# Altium PCB JIANGYA.PcbDoc
Units mil, origin at the board's own origin, x right, y up, seen from the top; angles counter-clockwise.
Board outline 6000 x 4000 mil, 2 copper layers (Top Layer, Bottom Layer); 72 components, 4 nets, 192 pads, 0 vias.
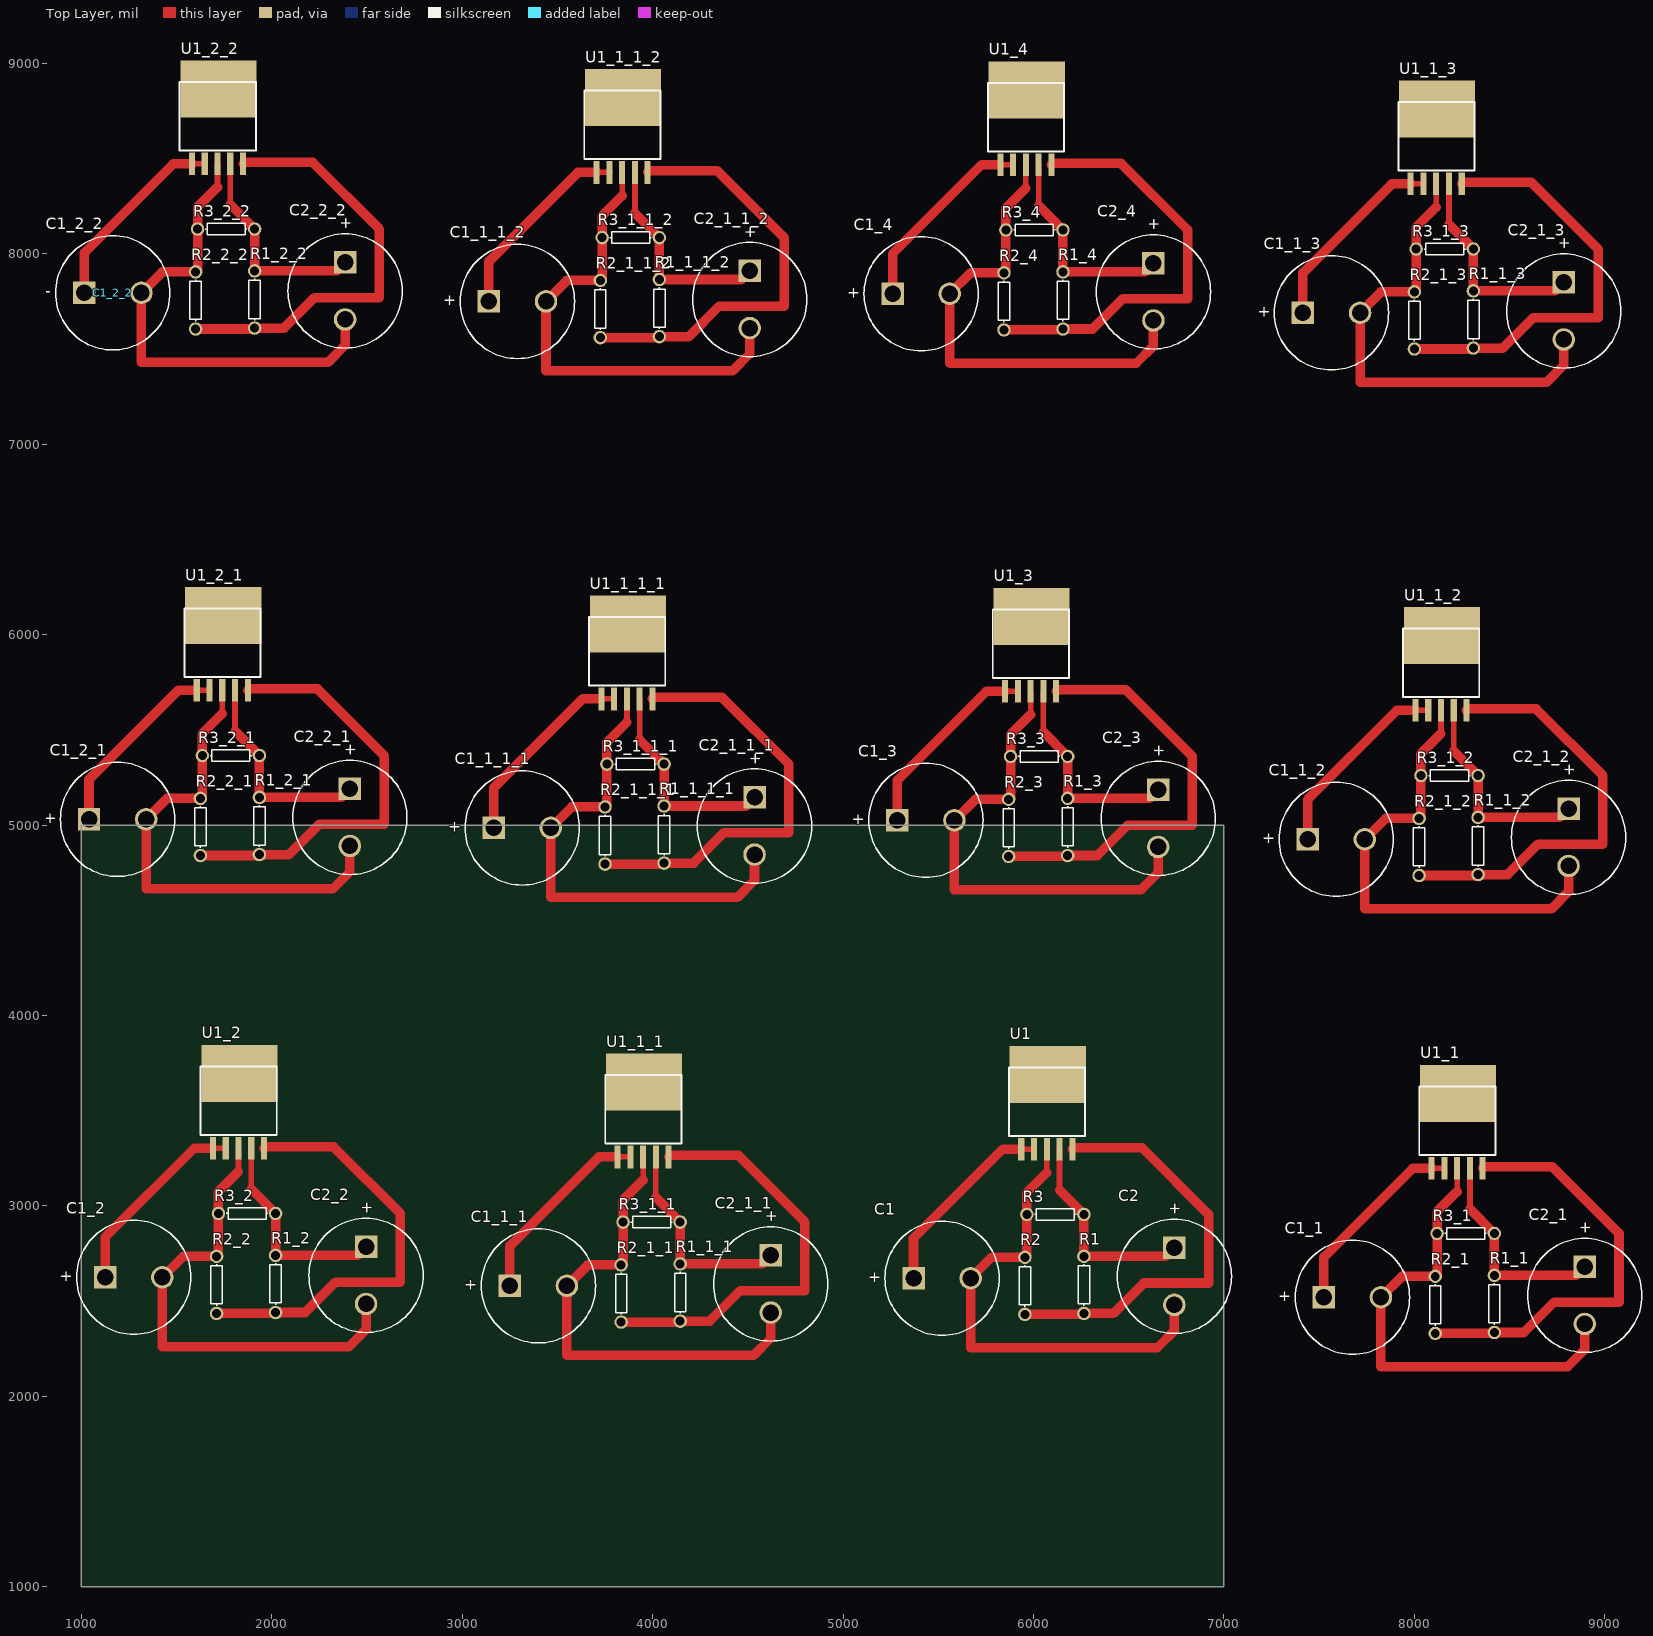
[diagram p0: Top Layer view]
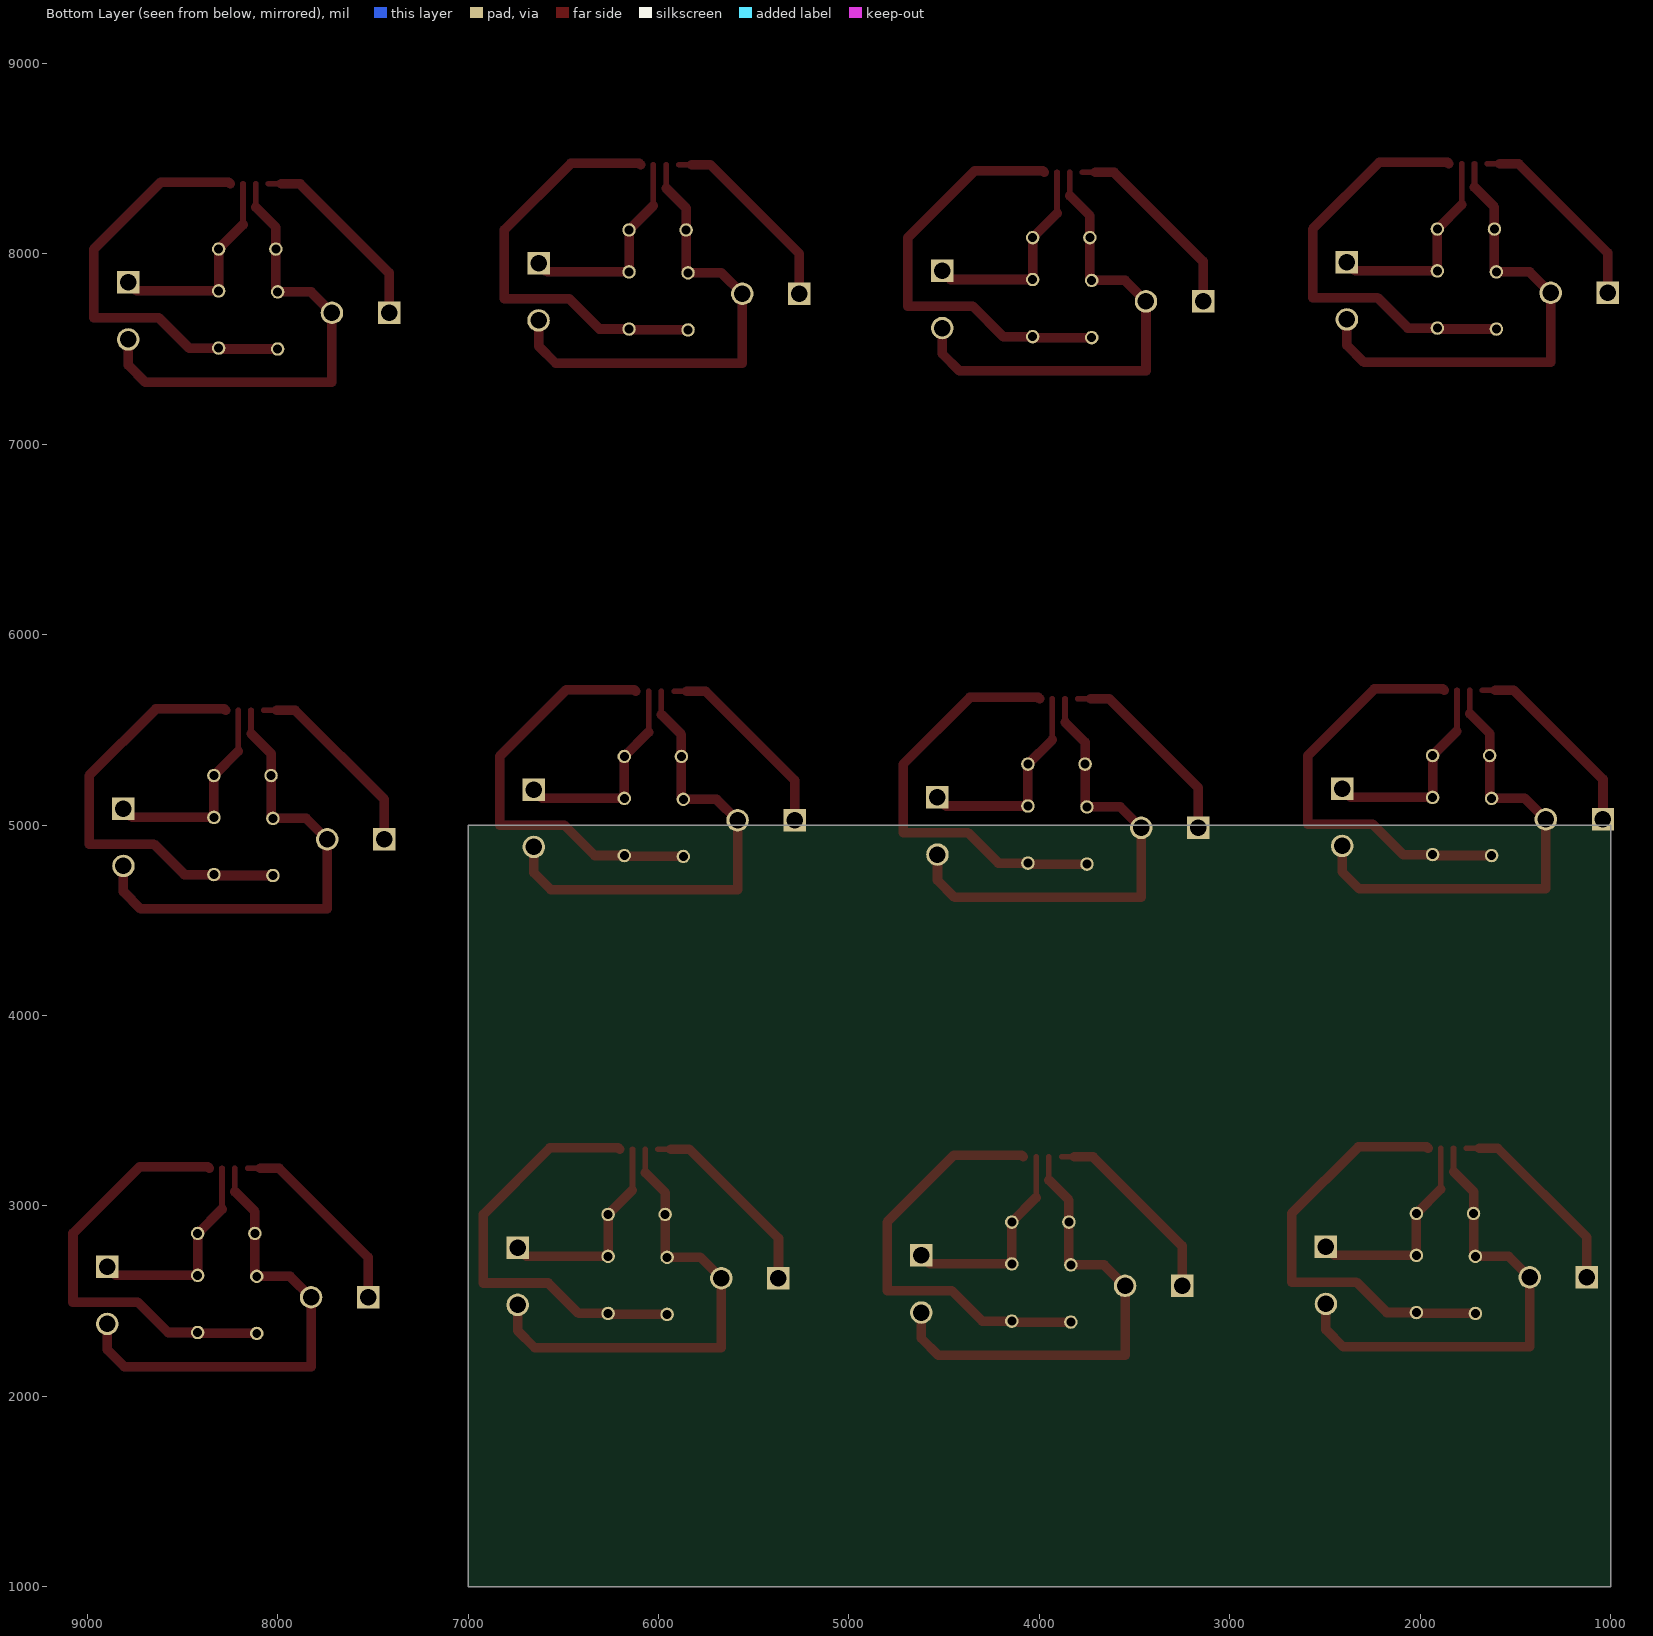
[diagram p1: Bottom Layer view, seen from below]

## Layer stack, top to bottom
Top Layer: signal copper 1.4
Dielectric: dielectric 12.6, FR-4, Dk 4.8
Bottom Layer: signal copper 1.4

## Board outline
1000,1000 7000,1000 7000,5000 1000,5000

## Design rules (kind name [scope] priority, off if disabled: settings)
Clearance [All] p1: gap=10
PolygonConnect [All] p1: connectstyle=Relief reliefconductorwidth=10 reliefentries=4 polygonreliefangle="90 Angle" airgapwidth=10
RoutingVias [All] p1: holewidth=28 width=50 viastyle="Through Hole" minholewidth=28 minwidth=50 maxholewidth=28 maxwidth=50
SolderMaskExpansion [All] p1: expansion=4
Width [All] p1: maxlimit=100 minlimit=20 preferedwidth=50
28 further rules are at their usual default settings.

## Classes and differential pairs
component class JIANGYA: C1 C2 R1 R2 R3 U1

## Components (designator, comment, footprint, x,y, rotation, side; value= is the part's Value field where it differs from the comment)
C1 "10uf" RB7.6-15 5520,2620 r180 top
C1_1 "10uf" RB7.6-15 7675,2520 r180 top (schematic designator C1)
C1_1_1 "10uf" RB7.6-15 3400,2580 r180 top (schematic designator C1)
C1_1_1_1 "10uf" RB7.6-15 3315,4985 r180 top (schematic designator C1)
C1_1_1_2 "10uf" RB7.6-15 3290,7750 r180 top (schematic designator C1)
C1_1_2 "10uf" RB7.6-15 7590,4925 r180 top (schematic designator C1)
C1_1_3 "10uf" RB7.6-15 7565,7690 r180 top (schematic designator C1)
C1_2 "10uf" RB7.6-15 1275,2625 r180 top (schematic designator C1)
C1_2_1 "10uf" RB7.6-15 1190,5030 r180 top (schematic designator C1)
C1_2_2 "10uf" RB7.6-15 1165,7795 r180 top (schematic designator C1)
C1_3 "10uf" RB7.6-15 5435,5025 r180 top (schematic designator C1)
C1_4 "10uf" RB7.6-15 5410,7790 r180 top (schematic designator C1)
C2 "22uf" RB7.6-15 6740,2630 r90 top
C2_1 "22uf" RB7.6-15 8895,2530 r90 top (schematic designator C2)
C2_1_1 "22uf" RB7.6-15 4620,2590 r90 top (schematic designator C2)
C2_1_1_1 "22uf" RB7.6-15 4535,4995 r90 top (schematic designator C2)
C2_1_1_2 "22uf" RB7.6-15 4510,7760 r90 top (schematic designator C2)
C2_1_2 "22uf" RB7.6-15 8810,4935 r90 top (schematic designator C2)
C2_1_3 "22uf" RB7.6-15 8785,7700 r90 top (schematic designator C2)
C2_2 "22uf" RB7.6-15 2495,2635 r90 top (schematic designator C2)
C2_2_1 "22uf" RB7.6-15 2410,5040 r90 top (schematic designator C2)
C2_2_2 "22uf" RB7.6-15 2385,7805 r90 top (schematic designator C2)
C2_3 "22uf" RB7.6-15 6655,5035 r90 top (schematic designator C2)
C2_4 "22uf" RB7.6-15 6630,7800 r90 top (schematic designator C2)
R1 "3.03R" AXIAL-0.3 6265,2585 r90 top
R1_1 "3.03R" AXIAL-0.3 8420,2485 r90 top (schematic designator R1)
R1_1_1 "3.03R" AXIAL-0.3 4145,2545 r90 top (schematic designator R1)
R1_1_1_1 "3.03R" AXIAL-0.3 4060,4950 r90 top (schematic designator R1)
R1_1_1_2 "3.03R" AXIAL-0.3 4035,7715 r90 top (schematic designator R1)
R1_1_2 "3.03R" AXIAL-0.3 8335,4890 r90 top (schematic designator R1)
R1_1_3 "3.03R" AXIAL-0.3 8310,7655 r90 top (schematic designator R1)
R1_2 "3.03R" AXIAL-0.3 2020,2590 r90 top (schematic designator R1)
R1_2_1 "3.03R" AXIAL-0.3 1935,4995 r90 top (schematic designator R1)
R1_2_2 "3.03R" AXIAL-0.3 1910,7760 r90 top (schematic designator R1)
R1_3 "3.03R" AXIAL-0.3 6180,4990 r90 top (schematic designator R1)
R1_4 "3.03R" AXIAL-0.3 6155,7755 r90 top (schematic designator R1)
R2 "R" AXIAL-0.3 5955,2580 r270 top
R2_1 "R" AXIAL-0.3 8110,2480 r270 top (schematic designator R2)
R2_1_1 "R" AXIAL-0.3 3835,2540 r270 top (schematic designator R2)
R2_1_1_1 "R" AXIAL-0.3 3750,4945 r270 top (schematic designator R2)
R2_1_1_2 "R" AXIAL-0.3 3725,7710 r270 top (schematic designator R2)
R2_1_2 "R" AXIAL-0.3 8025,4885 r270 top (schematic designator R2)
R2_1_3 "R" AXIAL-0.3 8000,7650 r270 top (schematic designator R2)
R2_2 "R" AXIAL-0.3 1710,2585 r270 top (schematic designator R2)
R2_2_1 "R" AXIAL-0.3 1625,4990 r270 top (schematic designator R2)
R2_2_2 "R" AXIAL-0.3 1600,7755 r270 top (schematic designator R2)
R2_3 "R" AXIAL-0.3 5870,4985 r270 top (schematic designator R2)
R2_4 "R" AXIAL-0.3 5845,7750 r270 top (schematic designator R2)
R3 "200" AXIAL-0.3 6115,2955 r0 top
R3_1 "200" AXIAL-0.3 8270,2855 r0 top (schematic designator R3)
R3_1_1 "200" AXIAL-0.3 3995,2915 r0 top (schematic designator R3)
R3_1_1_1 "200" AXIAL-0.3 3910,5320 r0 top (schematic designator R3)
R3_1_1_2 "200" AXIAL-0.3 3885,8085 r0 top (schematic designator R3)
R3_1_2 "200" AXIAL-0.3 8185,5260 r0 top (schematic designator R3)
R3_1_3 "200" AXIAL-0.3 8160,8025 r0 top (schematic designator R3)
R3_2 "200" AXIAL-0.3 1870,2960 r0 top (schematic designator R3)
R3_2_1 "200" AXIAL-0.3 1785,5365 r0 top (schematic designator R3)
R3_2_2 "200" AXIAL-0.3 1760,8130 r0 top (schematic designator R3)
R3_3 "200" AXIAL-0.3 6030,5360 r0 top (schematic designator R3)
R3_4 "200" AXIAL-0.3 6005,8125 r0 top (schematic designator R3)
U1 "MIC29302MU" TO263-5 6070,3530 r0 top
U1_1 "MIC29302MU" TO263-5 8225,3430 r0 top (schematic designator U1)
U1_1_1 "MIC29302MU" TO263-5 3950,3490 r0 top (schematic designator U1)
U1_1_1_1 "MIC29302MU" TO263-5 3865,5895 r0 top (schematic designator U1)
U1_1_1_2 "MIC29302MU" TO263-5 3840,8660 r0 top (schematic designator U1)
U1_1_2 "MIC29302MU" TO263-5 8140,5835 r0 top (schematic designator U1)
U1_1_3 "MIC29302MU" TO263-5 8115,8600 r0 top (schematic designator U1)
U1_2 "MIC29302MU" TO263-5 1825,3535 r0 top (schematic designator U1)
U1_2_1 "MIC29302MU" TO263-5 1740,5940 r0 top (schematic designator U1)
U1_2_2 "MIC29302MU" TO263-5 1715,8705 r0 top (schematic designator U1)
U1_3 "MIC29302MU" TO263-5 5985,5935 r0 top (schematic designator U1)
U1_4 "MIC29302MU" TO263-5 5960,8700 r0 top (schematic designator U1)

## Footprints (in the part's own frame and the unit in brackets; to place one, negate y for a bottom-side part, rotate by r counter-clockwise, add the part's x,y. Pads: shape width x height; smd on the part's side, far side on the other; paste and mask are expansions set on the pad)
AXIAL-0.3 [mm] "Axial Device, Thru-Hole; 2 Leads; 0.3 in Pin Spacing"
  round 1.8 hole 1.2: 1(-3.81,0) 2(3.81,0)
  silkscreen extent -2.77,-0.76 2.77,0.76
RB7.6-15 [mm] "Polarized Capacitor (Radial); 2 Leads"
  rect 3x3 hole 2.2: 1(3.81,0)
  round 3 hole 2.2: 2(-3.81,0)
  silkscreen extent -7.62,-7.62 7.62,7.62
TO263-5 [mil]
  rect 32x120 smd: 1(-134,-232.5) 2(-67,-232.5) 3(0,-232.5) 4(67,-232.5) 5(134,-232.5)
  rect 400x300 smd: 6(5,160)
  silkscreen extent -199,-162 201,198

## Part data
C1 C1_1 C1_1_1 C1_1_1_1 C1_1_1_2 C1_1_2 C1_1_3 C1_2 C1_2_1 C1_2_2 C1_3 C1_4 C2 C2_1 C2_1_1 C2_1_1_1 C2_1_1_2 C2_1_2 C2_1_3 C2_2 C2_2_1 C2_2_2 C2_3 C2_4: library part "Cap Pol1", "Polarized Capacitor (Radial)"
R1 R1_1 R1_1_1 R1_1_1_1 R1_1_1_2 R1_1_2 R1_1_3 R1_2 R1_2_1 R1_2_2 R1_3 R1_4 R2 R2_1 R2_1_1 R2_1_1_1 R2_1_1_2 R2_1_2 R2_1_3 R2_2 R2_2_1 R2_2_2 R2_3 R2_4 R3 R3_1 R3_1_1 R3_1_1_1 R3_1_1_2 R3_1_2 R3_1_3 R3_2 R3_2_1 R3_2_2 R3_3 R3_4: library part Res1, "Resistor"
U1 U1_1 U1_1_1 U1_1_1_1 U1_1_1_2 U1_1_2 U1_1_3 U1_2 U1_2_1 U1_2_2 U1_3 U1_4: library part Component_1

## Nets (pads, with @x,y where several pads share a name; then routed paths per layer and width w, separated by ;. In a path a pad name is that pad's centre, name@x,y a point inside that pad or via, vN(x,y) a via of type N, cw(c..) or ccw(c..) an arc to the next point about the centre after c; other vN are vias at no path point)
GND: C1.2 C2.2 R2.1 R3.1 U1.3 | length 2553
  Top Layer w30: 6070,3175 U1.3
  Top Layer w50: 6070,3175 5965,3070 R3.1 5965,2740 R2.1 5780,2730 C1.2 5670,2255 6650,2255 6740,2345 C2.2
NetR1_1: R1.1 R2.2 U1.5 | length 2250.4
  Top Layer w50: R2.2 R1.1@6260,2430 ; U1.5 6211.5,3305 6570,3305 6920,2955 6920,2595 6580,2595 6420,2435 R1.1
VIN: C1.1 U1.1 U1.2 | length 1036.6
  Top Layer w30: U1.1 U1.2
  Top Layer w50: C1.1 5370,2830 5837.5,3297.5 U1.1
VOUT: C2.1 R1.2 R3.2 U1.4 | length 1109.2
  Top Layer w30: 6137,3083 U1.4
  Top Layer w50: 6137,3083 R3.2 R1.2 6695,2735 C2.1
pads on no net: C1_1.1 C1_1.2 C1_1_1.1 C1_1_1.2 C1_1_1_1.1 C1_1_1_1.2 C1_1_1_2.1 C1_1_1_2.2 C1_1_2.1 C1_1_2.2 C1_1_3.1 C1_1_3.2 C1_2.1 C1_2.2 C1_2_1.1 C1_2_1.2 C1_2_2.1 C1_2_2.2 C1_3.1 C1_3.2 C1_4.1 C1_4.2 C2_1.1 C2_1.2 C2_1_1.1 C2_1_1.2 C2_1_1_1.1 C2_1_1_1.2 C2_1_1_2.1 C2_1_1_2.2 C2_1_2.1 C2_1_2.2 C2_1_3.1 C2_1_3.2 C2_2.1 C2_2.2 C2_2_1.1 C2_2_1.2 C2_2_2.1 C2_2_2.2 C2_3.1 C2_3.2 C2_4.1 C2_4.2 R1_1.1 R1_1.2 R1_1_1.1 R1_1_1.2 R1_1_1_1.1 R1_1_1_1.2 R1_1_1_2.1 R1_1_1_2.2 R1_1_2.1 R1_1_2.2 R1_1_3.1 R1_1_3.2 R1_2.1 R1_2.2 R1_2_1.1 R1_2_1.2 R1_2_2.1 R1_2_2.2 R1_3.1 R1_3.2 R1_4.1 R1_4.2 R2_1.1 R2_1.2 R2_1_1.1 R2_1_1.2 R2_1_1_1.1 R2_1_1_1.2 R2_1_1_2.1 R2_1_1_2.2 R2_1_2.1 R2_1_2.2 R2_1_3.1 R2_1_3.2 R2_2.1 R2_2.2 R2_2_1.1 R2_2_1.2 R2_2_2.1 R2_2_2.2 R2_3.1 R2_3.2 R2_4.1 R2_4.2 R3_1.1 R3_1.2 R3_1_1.1 R3_1_1.2 R3_1_1_1.1 R3_1_1_1.2 R3_1_1_2.1 R3_1_1_2.2 R3_1_2.1 R3_1_2.2 R3_1_3.1 R3_1_3.2 R3_2.1 R3_2.2 R3_2_1.1 R3_2_1.2 R3_2_2.1 R3_2_2.2 R3_3.1 R3_3.2 R3_4.1 R3_4.2 U1.6 U1_1.1 U1_1.2 U1_1.3 U1_1.4 U1_1.5 U1_1.6 U1_1_1.1 U1_1_1.2 U1_1_1.3 U1_1_1.4 U1_1_1.5 U1_1_1.6 U1_1_1_1.1 U1_1_1_1.2 U1_1_1_1.3 U1_1_1_1.4 U1_1_1_1.5 U1_1_1_1.6 U1_1_1_2.1 U1_1_1_2.2 U1_1_1_2.3 U1_1_1_2.4 U1_1_1_2.5 U1_1_1_2.6 U1_1_2.1 U1_1_2.2 U1_1_2.3 U1_1_2.4 U1_1_2.5 U1_1_2.6 U1_1_3.1 U1_1_3.2 U1_1_3.3 U1_1_3.4 U1_1_3.5 U1_1_3.6 U1_2.1 U1_2.2 U1_2.3 U1_2.4 U1_2.5 U1_2.6 U1_2_1.1 U1_2_1.2 U1_2_1.3 U1_2_1.4 U1_2_1.5 U1_2_1.6 U1_2_2.1 U1_2_2.2 U1_2_2.3 U1_2_2.4 U1_2_2.5 U1_2_2.6 U1_3.1 U1_3.2 U1_3.3 U1_3.4 U1_3.5 U1_3.6 U1_4.1 U1_4.2 U1_4.3 U1_4.4 U1_4.5 U1_4.6
copper on no net: | length 76440.5
  Top Layer w30: 1581,8472.5 1648,8472.5 ; 1606,5707.5 1673,5707.5 ; 1691,3302.5 1758,3302.5 ; 1715,8350 1715,8472.5 ; 1740,5585 1740,5707.5 ; 1782,8258 1782,8472.5 ; 1807,5493 1807,5707.5 ; 1825,3180 1825,3302.5 ; 1892,3088 1892,3302.5 ; 3706,8427.5 3773,8427.5 ; 3731,5662.5 3798,5662.5 ; 3816,3257.5 3883,3257.5 ; 3840,8305 3840,8427.5 ; 3865,5540 3865,5662.5 ; 3907,8213 3907,8427.5 ; 3932,5448 3932,5662.5 ; 3950,3135 3950,3257.5 ; 4017,3043 4017,3257.5 ; 5826,8467.5 5893,8467.5 ; 5851,5702.5 5918,5702.5 ; 5960,8345 5960,8467.5 ; 5985,5580 5985,5702.5 ; 6027,8253 6027,8467.5 ; 6052,5488 6052,5702.5 ; 7981,8367.5 8048,8367.5 ; 8006,5602.5 8073,5602.5 ; 8091,3197.5 8158,3197.5 ; 8115,8245 8115,8367.5 ; 8140,5480 8140,5602.5 ; 8182,8153 8182,8367.5 ; 8207,5388 8207,5602.5 ; 8225,3075 8225,3197.5 ; 8292,2983 8292,3197.5
  Top Layer w50: 1015,7795 1015,8005 1482.5,8472.5 1581,8472.5 ; 1040,5030 1040,5240 1507.5,5707.5 1606,5707.5 ; 1125,2625 1125,2835 1592.5,3302.5 1691,3302.5 ; 1600,7605 1905,7605 ; 1625,4840 1930,4840 ; 1710,2435 2015,2435 ; 1715,8350 1610,8245 1610,8130 1610,7915 1600,7905 1425,7905 1315,7795 1315,7430 2295,7430 2385,7520 2385,7655 ; 1740,5585 1635,5480 1635,5365 1635,5150 1625,5140 1450,5140 1340,5030 1340,4665 2320,4665 2410,4755 2410,4890 ; 1782,8258 1910,8130 1910,7910 2340,7910 2385,7955 ; 1807,5493 1935,5365 1935,5145 2365,5145 2410,5190 ; 1825,3180 1720,3075 1720,2960 1720,2745 1710,2735 1535,2735 1425,2625 1425,2260 2405,2260 2495,2350 2495,2485 ; 1849,8472.5 1856.5,8480 2215,8480 2565,8130 2565,7770 2225,7770 2065,7610 1910,7610 ; 1874,5707.5 1881.5,5715 2240,5715 2590,5365 2590,5005 2250,5005 2090,4845 1935,4845 ; 1892,3088 2020,2960 2020,2740 2450,2740 2495,2785 ; 1959,3302.5 1966.5,3310 2325,3310 2675,2960 2675,2600 2335,2600 2175,2440 2020,2440 ; 3140,7750 3140,7960 3607.5,8427.5 3706,8427.5 ; 3165,4985 3165,5195 3632.5,5662.5 3731,5662.5 ; 3250,2580 3250,2790 3717.5,3257.5 3816,3257.5 ; 3725,7560 4030,7560 ; 3750,4795 4055,4795 ; 3835,2390 4140,2390 ; 3840,8305 3735,8200 3735,8085 3735,7870 3725,7860 3550,7860 3440,7750 3440,7385 4420,7385 4510,7475 4510,7610 ; 3865,5540 3760,5435 3760,5320 3760,5105 3750,5095 3575,5095 3465,4985 3465,4620 4445,4620 4535,4710 4535,4845 ; 3907,8213 4035,8085 4035,7865 4465,7865 4510,7910 ; 3932,5448 4060,5320 4060,5100 4490,5100 4535,5145 ; 3950,3135 3845,3030 3845,2915 3845,2700 3835,2690 3660,2690 3550,2580 3550,2215 4530,2215 4620,2305 4620,2440 ; 3974,8427.5 3981.5,8435 4340,8435 4690,8085 4690,7725 4350,7725 4190,7565 4035,7565 ; 3999,5662.5 4006.5,5670 4365,5670 4715,5320 4715,4960 4375,4960 4215,4800 4060,4800 ; 4017,3043 4145,2915 4145,2695 4575,2695 4620,2740 ; 4084,3257.5 4091.5,3265 4450,3265 4800,2915 4800,2555 4460,2555 4300,2395 4145,2395 ; 5260,7790 5260,8000 5727.5,8467.5 5826,8467.5 ; 5285,5025 5285,5235 5752.5,5702.5 5851,5702.5 ; 5845,7600 6150,7600 ; 5870,4835 6175,4835 ; 5960,8345 5855,8240 5855,8125 5855,7910 5845,7900 5670,7900 5560,7790 5560,7425 6540,7425 6630,7515 6630,7650 ; 5985,5580 5880,5475 5880,5360 5880,5145 5870,5135 5695,5135 5585,5025 5585,4660 6565,4660 6655,4750 6655,4885 ; 6027,8253 6155,8125 6155,7905 6585,7905 6630,7950 ; 6052,5488 6180,5360 6180,5140 6610,5140 6655,5185 ; 6094,8467.5 6101.5,8475 6460,8475 6810,8125 6810,7765 6470,7765 6310,7605 6155,7605 ; 6119,5702.5 6126.5,5710 6485,5710 6835,5360 6835,5000 6495,5000 6335,4840 6180,4840 ; 7415,7690 7415,7900 7882.5,8367.5 7981,8367.5 ; 7440,4925 7440,5135 7907.5,5602.5 8006,5602.5 ; 7525,2520 7525,2730 7992.5,3197.5 8091,3197.5 ; 8000,7500 8305,7500 ; 8025,4735 8330,4735 ; 8110,2330 8415,2330 ; 8115,8245 8010,8140 8010,8025 8010,7810 8000,7800 7825,7800 7715,7690 7715,7325 8695,7325 8785,7415 8785,7550 ; 8140,5480 8035,5375 8035,5260 8035,5045 8025,5035 7850,5035 7740,4925 7740,4560 8720,4560 8810,4650 8810,4785 ; 8182,8153 8310,8025 8310,7805 8740,7805 8785,7850 ; 8207,5388 8335,5260 8335,5040 8765,5040 8810,5085 ; 8225,3075 8120,2970 8120,2855 8120,2640 8110,2630 7935,2630 7825,2520 7825,2155 8805,2155 8895,2245 8895,2380 ; 8249,8367.5 8256.5,8375 8615,8375 8965,8025 8965,7665 8625,7665 8465,7505 8310,7505 ; 8274,5602.5 8281.5,5610 8640,5610 8990,5260 8990,4900 8650,4900 8490,4740 8335,4740 ; 8292,2983 8420,2855 8420,2635 8850,2635 8895,2680 ; 8359,3197.5 8366.5,3205 8725,3205 9075,2855 9075,2495 8735,2495 8575,2335 8420,2335

## Text inside footprints (layer, text, board x,y; h text height)
C1: Top Overlay "+" at 5199.85,2649.01 h59.06 r180
C1_1: Top Overlay "+" at 7354.85,2549.01 h59.06 r180
C1_1_1: Top Overlay "+" at 3079.85,2609.01 h59.06 r180
C1_1_1_1: Top Overlay "+" at 2994.85,5014.01 h59.06 r180
C1_1_1_2: Top Overlay "+" at 2969.85,7779.01 h59.06 r180
C1_1_2: Top Overlay "+" at 7269.85,4954.01 h59.06 r180
C1_1_3: Top Overlay "+" at 7244.85,7719.01 h59.06 r180
C1_2: Top Overlay "+" at 954.85,2654.01 h59.06 r180
C1_2_1: Top Overlay "+" at 869.85,5059.01 h59.06 r180
C1_2_2: Top Overlay "+" at 844.85,7824.01 h59.06 r180
C1_3: Top Overlay "+" at 5114.85,5054.01 h59.06 r180
C1_4: Top Overlay "+" at 5089.85,7819.01 h59.06 r180
C2: Top Overlay "+" at 6769.01,2950.15 h59.06 r90
C2_1: Top Overlay "+" at 8924.01,2850.15 h59.06 r90
C2_1_1: Top Overlay "+" at 4649.01,2910.15 h59.06 r90
C2_1_1_1: Top Overlay "+" at 4564.01,5315.15 h59.06 r90
C2_1_1_2: Top Overlay "+" at 4539.01,8080.15 h59.06 r90
C2_1_2: Top Overlay "+" at 8839.01,5255.15 h59.06 r90
C2_1_3: Top Overlay "+" at 8814.01,8020.15 h59.06 r90
C2_2: Top Overlay "+" at 2524.01,2955.15 h59.06 r90
C2_2_1: Top Overlay "+" at 2439.01,5360.15 h59.06 r90
C2_2_2: Top Overlay "+" at 2414.01,8125.15 h59.06 r90
C2_3: Top Overlay "+" at 6684.01,5355.15 h59.06 r90
C2_4: Top Overlay "+" at 6659.01,8120.15 h59.06 r90